# Altium PCB PCB1.PcbDoc
Units mm, origin at the board's own origin, x right, y up, seen from the top; angles counter-clockwise.
Board outline 37.6 x 55 mm, 4 copper layers (Top Layer, Mid Layer 1, Mid Layer 2, Bottom Layer), stack 0.97 mm thick; 33 components, 27 nets, 135 pads, 64 vias.
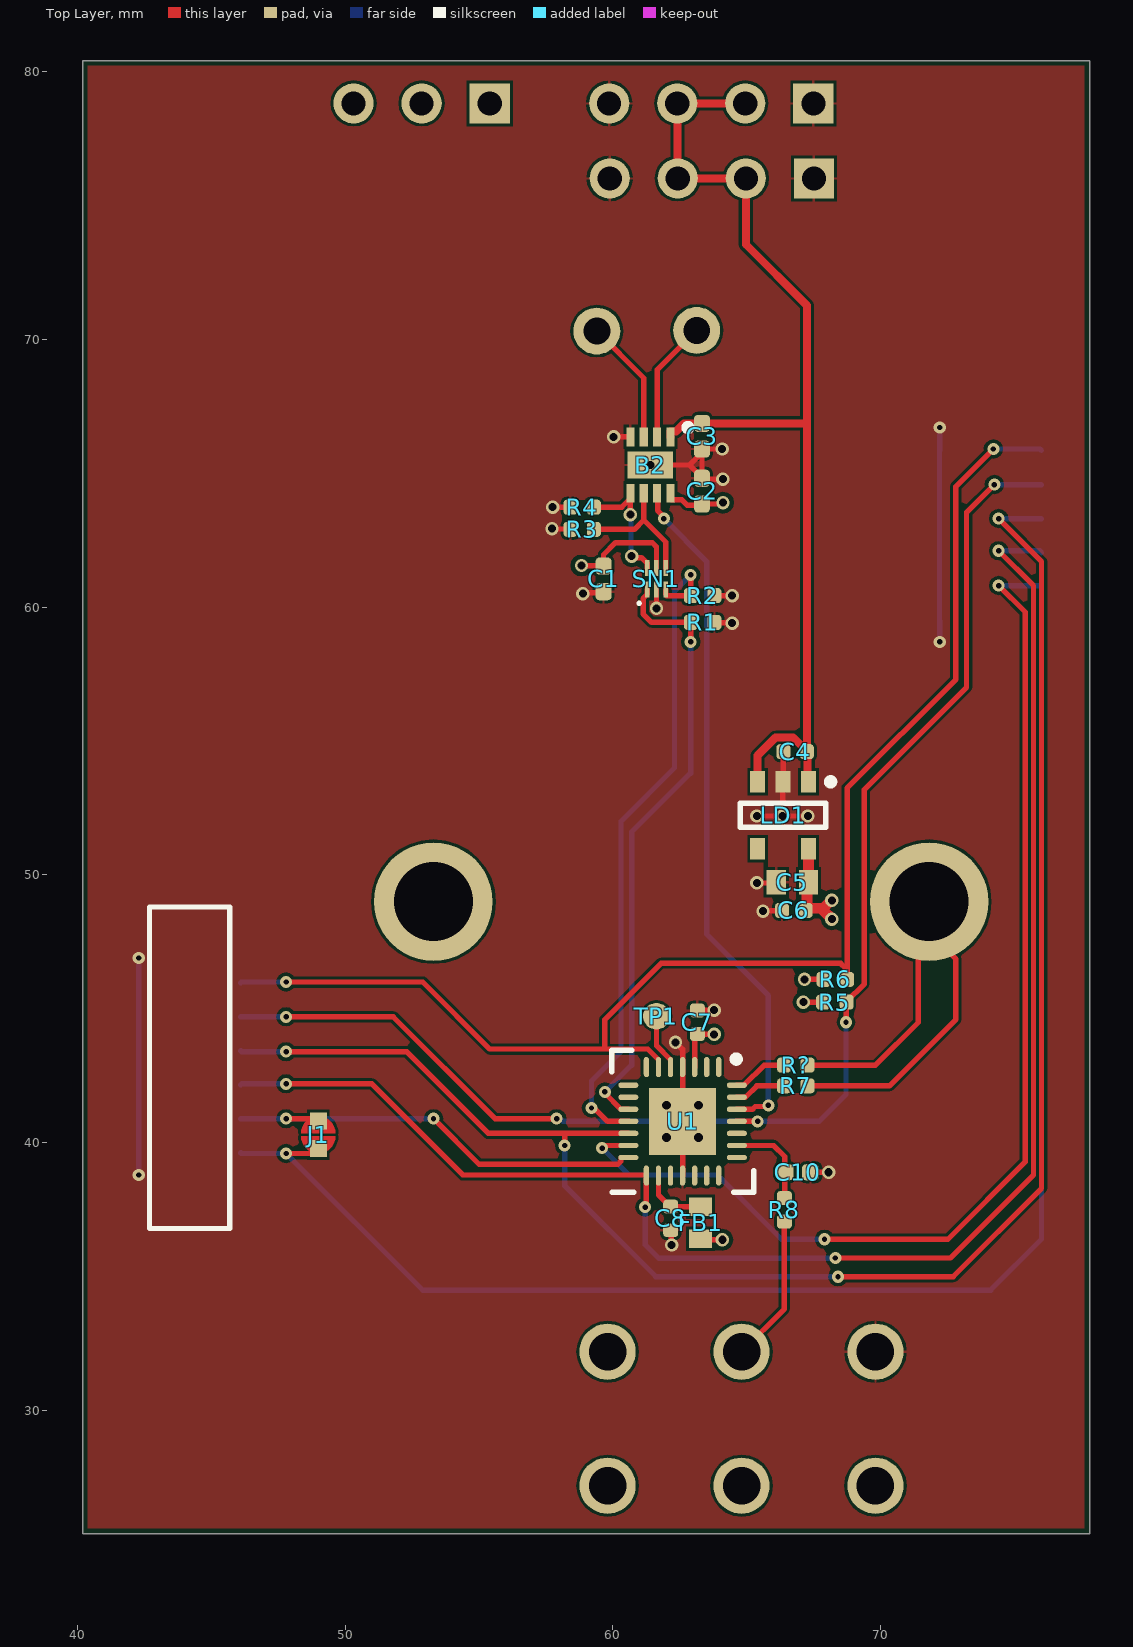
[diagram p0: Top Layer view]
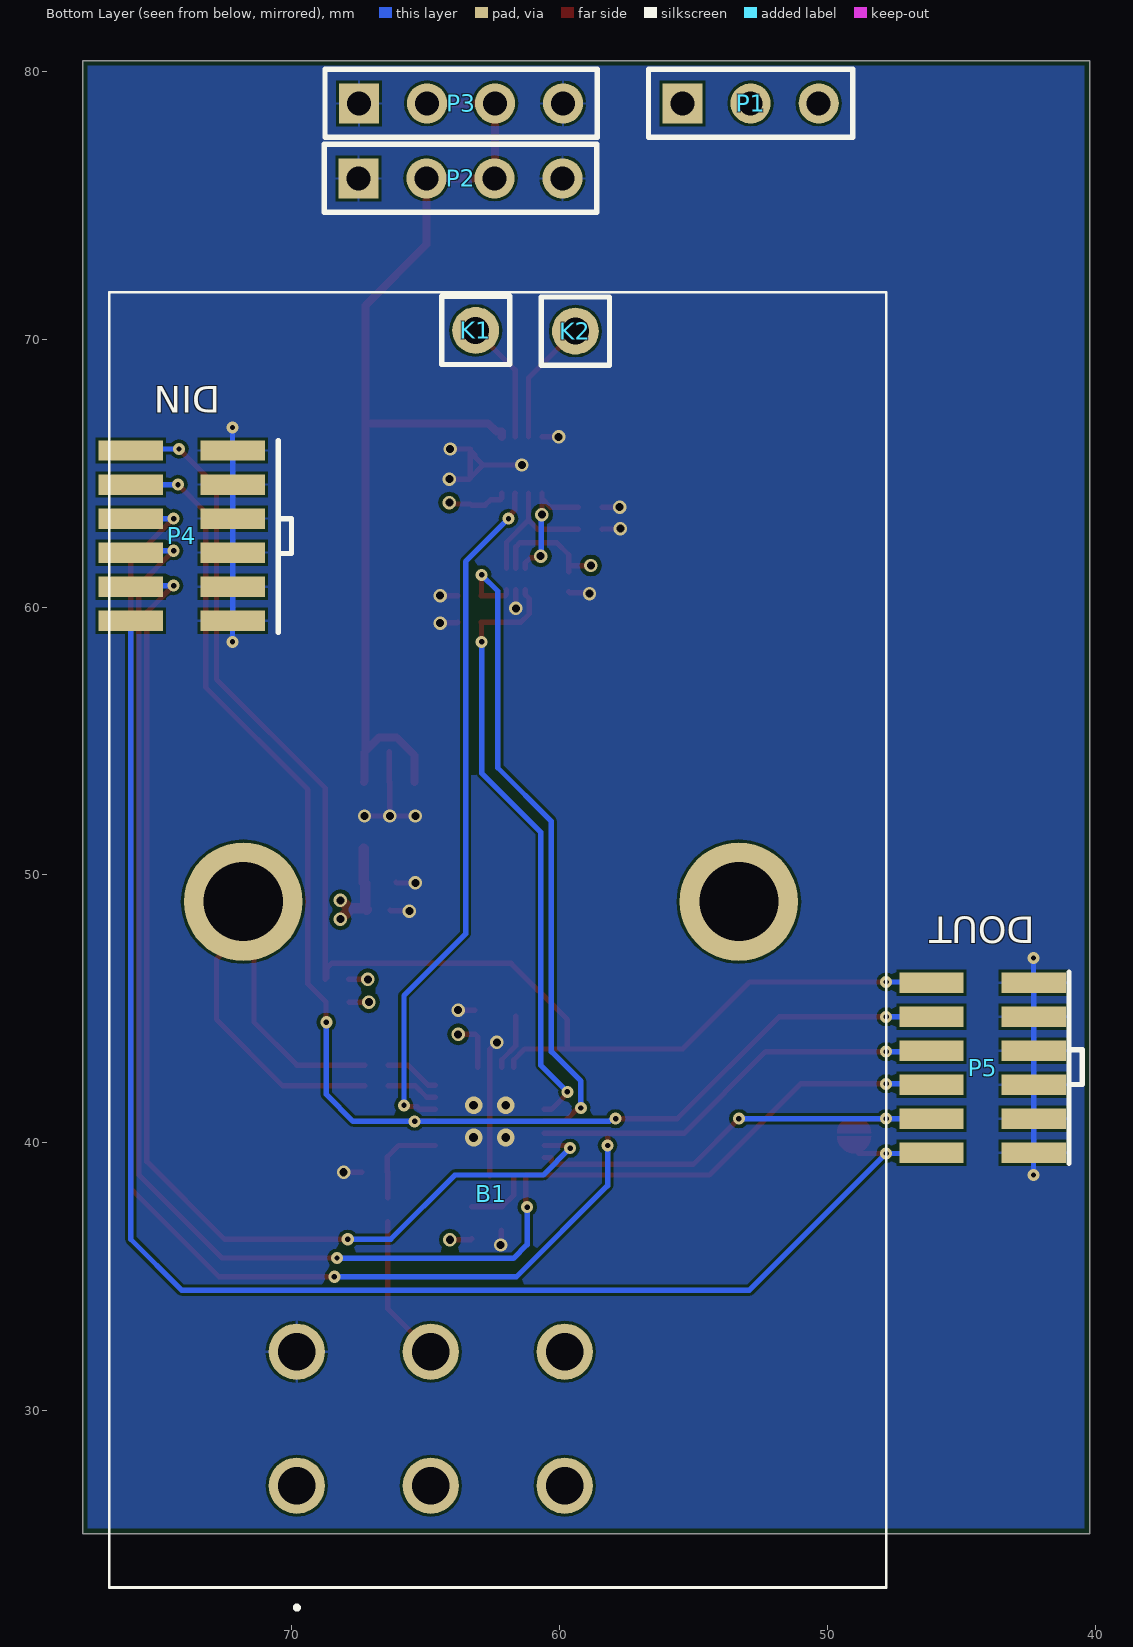
[diagram p1: Bottom Layer view, seen from below]
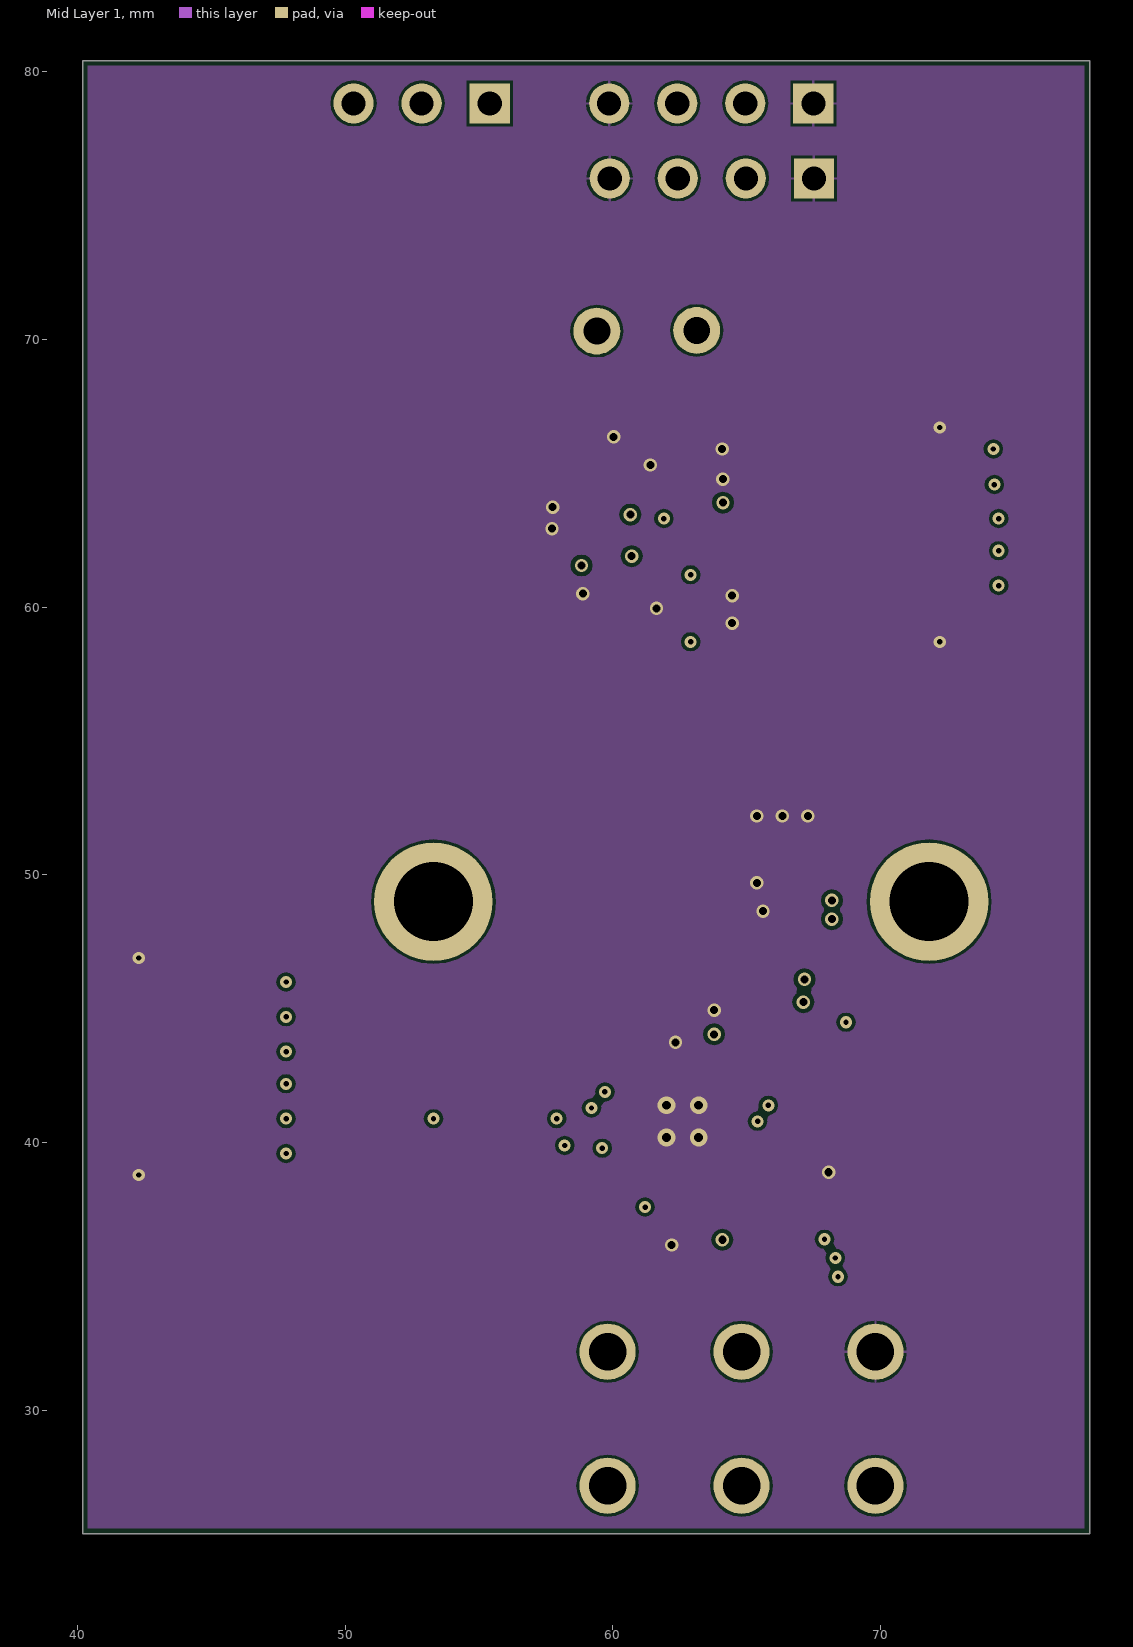
[diagram p2: Mid Layer 1]
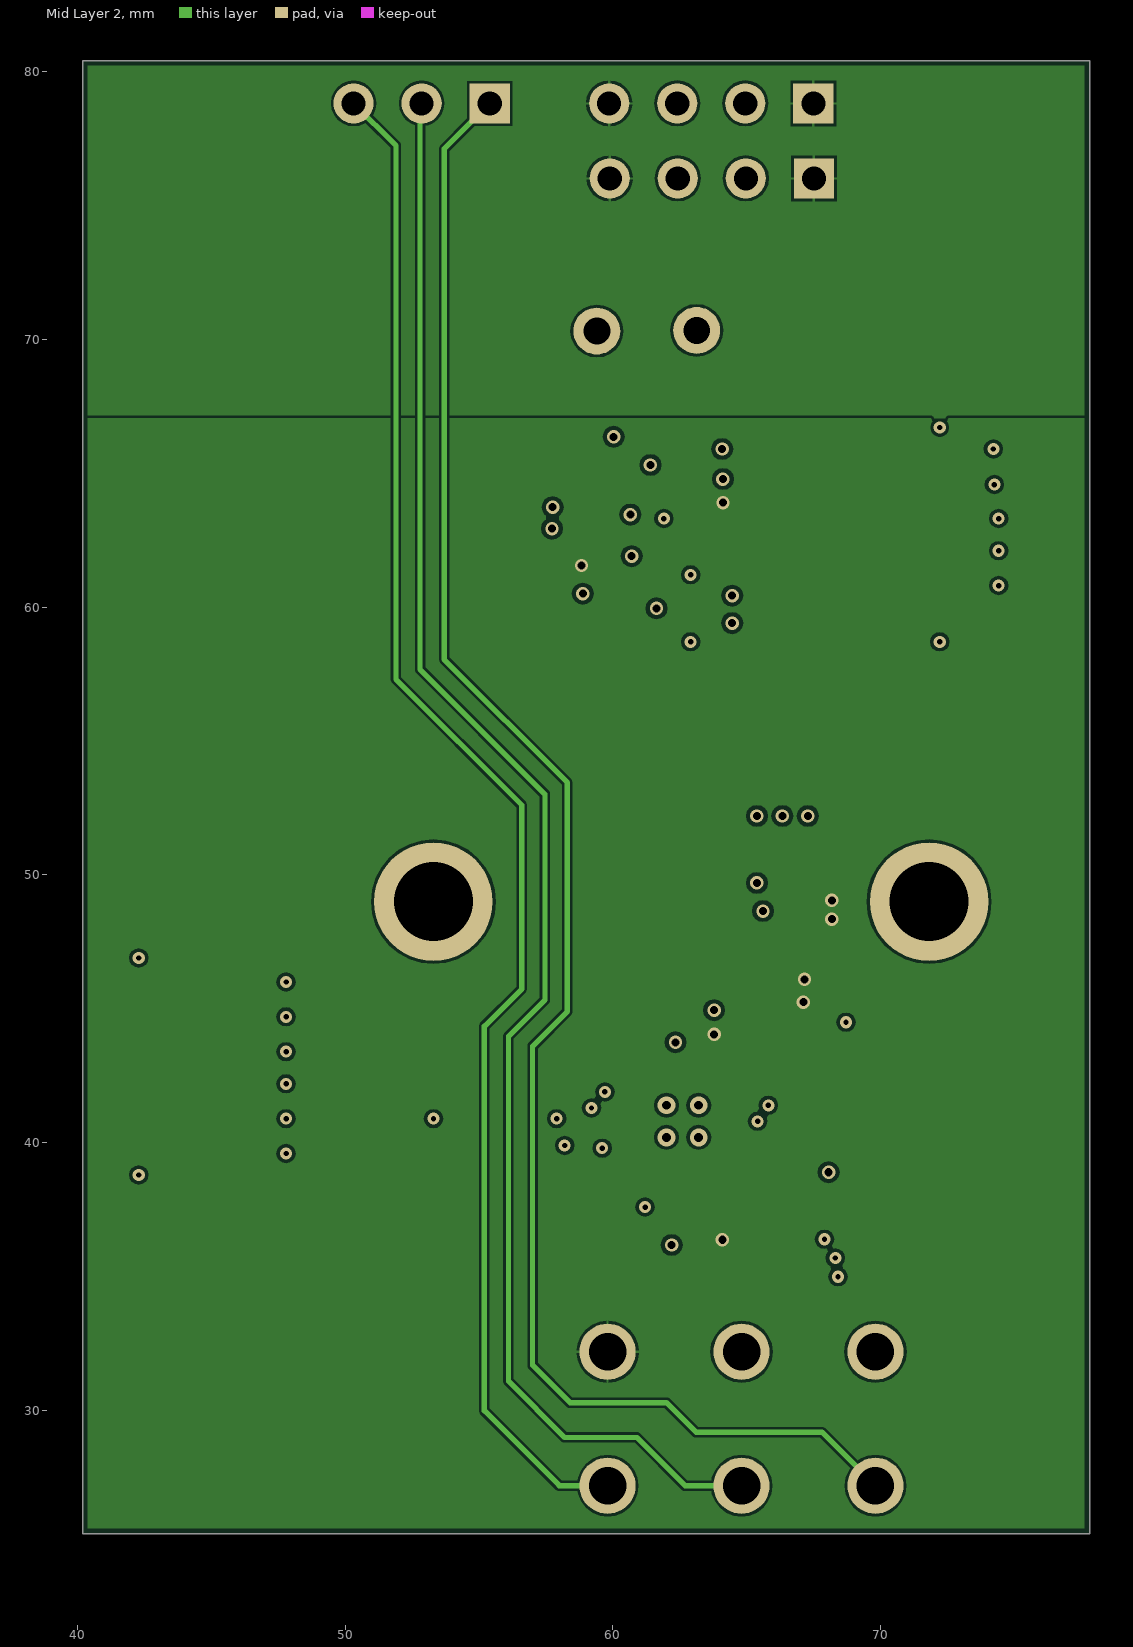
[diagram p3: Mid Layer 2]

## Layer stack, top to bottom
Top Solder: solder mask 0.0127, Solder Resist, Dk 3.8
Top Layer: signal copper 0.035
Dielectric 1: prepreg 0.2, 7628, Dk 4.6
Mid Layer 1: signal copper 0.0175
Core: core 0.465, FR-4, Dk 4.5
Mid Layer 2: signal copper 0.0175
Dielectric 2: prepreg 0.2, 7628, Dk 4.6
Bottom Layer: signal copper 0.035
Bottom Solder: solder mask 0.0127, Solder Resist, Dk 3.8

## Board outline
40.2,25.4 40.2,80.4 77.8,80.4 77.8,25.4

## Design rules (kind name [scope] priority, off if disabled: settings)
BoardOutlineClearance [All] p1: gap=0.2 ignorepadtopadclearanceinfootprint=FALSE
Clearance [All] p1: gap=0.102 ignorepadtopadclearanceinfootprint=FALSE except(0.127: Arc-Via Track-Via SMDPad-Via THPad-Via Via-Via Via-Fill Via-Poly Via-Region Via-Text; 0.25: Arc-Hole Track-Hole SMDPad-Hole THPad-Hole Via-Hole Fill-Hole Poly-Hole Region-Hole Text-Hole)
ComponentClearance [All] p1: gap=0.102 collisioncheckmode=3 verticalgap=0.102 showdistances=TRUE
DiffPairsRouting [All] p1: maxlimit=0.102 minlimit=0.102 mostfreqgap=0.102 toplayer_minwidth=0.102 toplayer_maxwidth=1816.048 toplayer_prefwidth=0.102 midlayer1_minwidth=0.102 midlayer1_maxwidth=1816.048 midlayer1_prefwidth=0.102 midlayer2_minwidth=0.102 midlayer2_maxwidth=1816.048 midlayer2_prefwidth=0.102 bottomlayer_minwidth=0.102 bottomlayer_maxwidth=1816.048 bottomlayer_prefwidth=0.102 maxuncoupledlength=12.7
Height [All] p1: minheight=0 maxheight=1816.048 prefheight=12.7
HoleSize [All] p1: absolutevalues=TRUE maxlimit=6.3 minlimit=0.2 maxpercent=80.000 minpercent=20.000
HoleToHoleClearance [All] p1: gap=0.25 allowstackedmicrovias=FALSE
MinimumAnnularRing [All] p1: minimumring=0.076
MinimumSolderMaskSliver [All] p1: minsoldermaskwidth=0
PlaneClearance [All] p1: clearance=0.102
PlaneConnect PlaneConnectPowerPads [InPadClass('PowerPads')] p1: planeconnectstyle=Direct reliefexpansion=0.508 reliefentries=4 reliefconductorwidth=0.254 reliefairgap=0.254
PlaneConnect [All] p2: pad.planeconnectstyle=Relief pad.reliefexpansion=0.3 pad.reliefentries=4 pad.reliefconductorwidth=0.102 pad.reliefairgap=0.102 via.planeconnectstyle=Direct via.reliefexpansion=0.3 via.reliefentries=4 via.reliefconductorwidth=0.127 via.reliefairgap=0.127
PolygonConnect PolygonConnectPowerPads [All vs (InPadClass('PowerPads'))] p1: connectstyle=Direct reliefconductorwidth=0.254 reliefentries=4 polygonreliefangle="90 Angle" airgapwidth=0.254
PolygonConnect [All] p2: thpad.connectstyle=Relief thpad.reliefconductorwidth=0.102 thpad.reliefentries=4 thpad.polygonreliefangle="90 Angle" thpad.airgapwidth=0.102 smdpad.connectstyle=Relief smdpad.reliefconductorwidth=0.102 smdpad.reliefentries=4 smdpad.polygonreliefangle="90 Angle" smdpad.airgapwidth=0.102 via.connectstyle=Direct via.reliefconductorwidth=0.127 via.reliefentries=4 via.polygonreliefangle="90 Angle" via.airgapwidth=0.127
RoutingVias [All] p1: holewidth=0.2 width=0.45 viastyle="Through Hole" minholewidth=0.2 minwidth=0.45 maxholewidth=6.3 maxwidth=6.55
SilkToSilkClearance [All] p1: silktosilkclearance=0
SilkToSolderMaskClearance [IsPad] p1: minsilkscreentomaskgap=0.102 clearancetoexposedcopper=TRUE
SolderMaskExpansion [All] p1: expansion=0.075 istentingtop=FALSE
Width [All] p1: maxlimit=1816.048 minlimit=0.102 preferedwidth=0.102
20 further rules are at their usual default settings.

## Components (designator, comment, footprint, x,y, rotation, side; value= is the part's Value field where it differs from the comment)
B1 "PRM162-K420K-103B1" PRM162K415K103B1 69.8,27.2 r270 bottom locked
B2 "DRV8837CDSGR" SON50P200X200X80-9N 61.4,65.3 r270 top
C1 "100n" R1005_0402i_M 59.65,61.05 r90 top
C2 "100n" R1005_0402i_M 63.325,64.325 r270 top
C3 "100n" R1005_0402i_M 63.325,66.375 r270 top
C4 "100n" R1005_0402i_L 66.8,54.6 r180 top
C5 "1u" C1608_0603I_L 66.7,49.725 r180 top
C6 "100n" R1005_0402i_L 66.75,48.675 r180 top
C7 "100n" R1005_0402i_L 63.15,44.5 r90 top
C8 "100n" R1005_0402i_L 62.158,37.176 r270 top
C10 "100n" R1005_0402i_M 66.9,38.9 r0 top
FB1 "FERITTE BEAD" R1608_0603I_L 63.272,37.017 r90 top
J1 "Terminator" solderJumper 49,40.3 r90 top
K1 "H1x1" H1x1 63.125,70.325 r180 bottom
K2 "H1x1" H1x1 59.4,70.3 r180 bottom
LD1 "NCP115 3.3V" TSOP95P280X110-6L 66.35,52.225 r270 top
P1 "Header 3" HDR1X3 55.4,78.8 r180 bottom
P2 "PWR" HDR1X4 67.5,76 r180 bottom
P3 "PWR" HDR1X4 67.48,78.8 r180 bottom
P4 "Input" "1.27mm SMD conn" 74.095,62.665 r270 bottom
P5 "Output" "1.27mm SMD conn" 44.2,42.8 r270 bottom
R1 "100k" R1005_0402i_L 63.35,59.425 r0 top
R2 "100k" R1005_0402i_L 63.35,60.425 r0 top
R3 "100k" R1005_0402i_L 58.85,62.9 r180 top
R4 "100k" R1005_0402i_L 58.85,63.725 r180 top
R5 "100k" R1005_0402i_L 68.285,45.25 r0 top
R6 "100k" R1005_0402i_L 68.3,46.1 r0 top
R7 "1M" R1005_0402i_L 66.825,42.125 r0 top
R8 "1k" R1005_0402i_L 66.4,37.5 r90 top
R? "1k" R1005_0402i_L 66.825,42.9 r0 top
SN1 "SN74LV" SON35P100X40-6N 61.625,61.05 r90 top
TP1 "PAD" PAD 61.625,44.725 r135 top
U1 "ATtiny88-MMU" 28M1_N 62.6,40.8 r270 top

## Footprints (in the part's own frame and the unit in brackets; to place one, negate y for a bottom-side part, rotate by r counter-clockwise, add the part's x,y. Pads: shape width x height; smd on the part's side, far side on the other; paste and mask are expansions set on the pad)
"1.27mm SMD conn" [mm]
  rect 0.76x2.4 smd: 1(3.175,1.905) 2(3.175,-1.905) 3(1.905,1.905) 4(1.905,-1.905) 5(0.635,1.905) 6(0.635,-1.905) 7(-0.635,1.905) 8(-0.635,-1.905) 9(-1.905,1.905) 10(-1.905,-1.905) 11(-3.175,1.905) 12(-3.175,-1.905)
28M1_N [mm] "QFN, 28-Leads, Body 4x4mm, Pitch 0.45mm, IPC Medium Density"
  oval 0.75x0.2 smd: 1(-2.025,1.35) 2(-2.025,0.9) 3(-2.025,0.45) 4(-2.025,0) 5(-2.025,-0.45) 6(-2.025,-0.9) 7(-2.025,-1.35) 15(2.025,-1.35) 16(2.025,-0.9) 17(2.025,-0.45) 18(2.025,0) 19(2.025,0.45) 20(2.025,0.9) 21(2.025,1.35)
  oval 0.2x0.75 smd: 8(-1.35,-2.025) 9(-0.9,-2.025) 10(-0.45,-2.025) 11(0,-2.025) 12(0.45,-2.025) 13(0.9,-2.025) 14(1.35,-2.025) 22(1.35,2.025) 23(0.9,2.025) 24(0.45,2.025) 25(0,2.025) 26(-0.45,2.025) 27(-0.9,2.025) 28(-1.35,2.025)
  rect 2.5x2.5 smd: 29(0,0)
  silkscreen extent -2.45,1.88 -2.2,2.13, body extent -2.02,-2.02 2.03,2.03, height 1
C1608_0603I_L [mm] "Chip Capacitor, 2-Leads, Body 1.57x0.85mm, IPC High Density"
  rect 0.72x0.9 smd: 1(-0.6,0) 2(0.6,0)
  body extent -0.82,-0.48 0.82,0.48, height 0.95
H1x1 [mm]
  round 1.75 hole 1: 1(0,0)
  silkscreen extent -1.27,-1.27 1.27,1.27, body extent -1.27,-1.27 1.27,1.27, height 8.4
HDR1X3 [mm] "Connector; Header; 3 Position"
  rect 1.5x1.5 hole 0.9: 1(0,0)
  round 1.5 hole 0.9: 2(2.54,0) 3(5.08,0)
  silkscreen extent -1.27,-1.27 6.35,1.27
HDR1X4 [mm] "Connector; Header; 4 Position"
  rect 1.5x1.5 hole 0.9: 1(0,0)
  round 1.5 hole 0.9: 2(2.54,0) 3(5.08,0) 4(7.62,0)
  silkscreen extent -1.27,-1.27 8.89,1.27
PAD [mm]
  round 1 smd: 1(0,0)
PRM162K415K103B1 [mm]
  round 2.1 hole 1.4: 1(0,0) 2(0,5) 3(0,10) 4(-5,0) 5(-5,5) 6(-5,10)
  round 4.425 hole 2.95: MH1(-21.8,-2) MH2(-21.8,16.5)
  silkscreen extent -44.55,-7 4.6,22, body extent -44.59,-6.99 23.76,27.64, height 30.47
R1005_0402i_L [mm] "Resistor, Chip; 1.00 mm L X 0.50 mm W X 0.40 mm H body"
  rrect50% 0.52x0.56 smd: 1(-0.44,0) 2(0.44,0)
  body extent -0.5,-0.25 0.5,0.25, height 0.4
R1005_0402i_M [mm] "Resistor, Chip; 1.00 mm L X 0.50 mm W X 0.40 mm H body"
  rrect50% 0.64x0.6 smd: 1(-0.48,0) 2(0.48,0)
  body extent -0.5,-0.25 0.5,0.25, height 0.4
R1608_0603I_L [mm] "Chip Resistor, 2-Leads, Body 1.57x0.85mm, IPC High Density"
  rect 0.7x0.85 smd: 1(-0.6,0) 2(0.6,0)
  body extent -0.82,-0.48 0.83,0.48, height 0.5
solderJumper [mil]
  rect 25x25 smd: 1(20,0) 2(-20,0)
  Top Layer region: -2.51,25 -12.08,23.1 -20.19,17.68 -25.61,9.57 -27.51,0 -27.51,0 -25.61,-9.57 -20.19,-17.68 -12.08,-23.1 -2.51,-25 -2.51,-25
  Top Layer region: 2.51,25 12.08,23.1 20.19,17.68 25.61,9.57 27.51,0 27.51,0 25.61,-9.57 20.19,-17.68 12.08,-23.1 2.51,-25 2.51,-25
SON35P100X40-6N [mm] "SON, 6-Leads, Body 1,00x1,00mm, Pitch 0,35mm, IPC Medium Density"
  rect 0.6x0.17 smd: 1(-0.4,0.35) 2(-0.4,0) 3(-0.4,-0.35) 4(0.4,-0.35) 5(0.4,0) 6(0.4,0.35)
  silkscreen extent -0.96,0.6 -0.86,0.7, body extent -0.57,-0.53 0.57,0.53, height 0.4
SON50P200X200X80-9N [mm]
  rect 0.7x0.3 smd: 1(-1.05,0.75) 2(-1.05,0.25) 3(-1.05,-0.25) 4(-1.05,-0.75) 5(1.05,-0.75) 6(1.05,-0.25) 7(1.05,0.25) 8(1.05,0.75)
  rect 1x1.7 smd: 9(0,0)
  silkscreen extent -1.52,1.28 -1.28,1.53, body extent -1.52,-1.02 1.52,1.02, height 0.25
TSOP95P280X110-6L [mm]
  rect 0.8x0.55 smd: 1(-1.25,0.95) 2(-1.25,0) 3(-1.25,-0.95) 4(1.25,-0.95) 5(1.25,0.95)
  silkscreen extent -1.37,-1.6 0.45,1.9, body extent -1.38,-1.6 1.38,1.6, height 1.1

## Part data
B1: "Potentiometers 10KOHMS KNURLED DUAL NO DET", Manufacturer_Name=Bourns, Mouser Part Number=652-PRM162K420K103B1, Datasheet Link=https://www.bourns.com/docs/product-datasheets/PDB18.pdf, Geometry.Height=28.5mm, Manufacturer_Part_Number=PRM162-K420K-103B1, Mouser Price/Stock=https://www.mouser.co.uk/ProductDetail/Bourns/PRM162-K420K-103B1?qs=U%2FacTlguYxaZbpiLvzzeCA%3D%3D
B2: "1A Low-Voltage H-Bridge Driver", Manufacturer_Name="Texas Instruments", Mouser Part Number=595-DRV8837CDSGR, Datasheet Link=http://www.ti.com/lit/gpn/drv8837c, Geometry.Height=0.8mm, Manufacturer_Part_Number=DRV8837CDSGR, Mouser Price/Stock=https://www.mouser.co.uk/ProductDetail/Texas-Instruments/DRV8837CDSGR?qs=vcbl%252BK4rRlftuEtjGJGzZQ%3D%3D
C1 C2 C3 C4 C5 C6 C7 C8 C10: library part C, "Capacitor"
J1: library part JMP_mini
K1 K2: "Header 1x1 (male)"
P1: "Header, 3-Pin", LatestRevisionDate=17-Jul-2002, LatestRevisionNote="Re-released for DXP Platform.", Publisher="Altium Limited"
P2 P3: library part "Header 4", "Header, 4-Pin", LatestRevisionDate=17-Jul-2002, LatestRevisionNote="Re-released for DXP Platform.", Publisher="Altium Limited"
P4 P5: library part "Header 6X2", "Header, 6-Pin, Dual row", LatestRevisionDate=17-Jul-2002, LatestRevisionNote="Re-released for DXP Platform.", Publisher="Altium Limited"
R1 R2 R3 R4 R5 R6 R7 R8 R?: library part R, "R"
U1: "8-bit AVR Microcontroller, 1.8-5.5V, 8KB Flash, 64 Bytes EEPROM, 512 Bytes SRAM, 28-pin MLF, Industrial Grade (-40°C to 85°C), Pb-Free", Supplier Part Number 1=ATTINY88-MMU-ND, ComponentLink1Description="Manufacturer Link", ComponentLink1URL=http://www.atmel.com/products/avr/default.asp?, ComponentLink2Description="ATtiny48/88 Datasheet", ComponentLink2URL=http://www.atmel.com/dyn/resources/prod_documents/doc8008.pdf, ComponentLink3Description="ATtiny48/88 Summary", ComponentLink3URL=http://www.atmel.com/dyn/resources/prod_documents/8008S.pdf, ComponentLink4Description="Atmel.com Home", ComponentLink4URL=http://www.atmel.com, DatasheetVersion="revC, Mar-2009", PackageDescription="28-pad, 4x4x1.0mm Body, Pitch 0.45mm, 2.4x2.4mm Exposed Pad, Plastic Very Thin QFN Package (VQFN)", PackageReference=28M1, PackageVersion="revB, Nov-2008", Published=1-Apr-2010, Publisher="Altium Limited", Supplier 1=Digi-Key, Supplier 2=Mouser, Supplier Part Number 2=556-ATTINY88-MMU

## Via types
v1: diameter 0.45, hole 0.2, Top Layer to Bottom Layer, 31 vias
v2: diameter 0.5, hole 0.3, Top Layer to Bottom Layer, 29 vias
v3: diameter 0.66, hole 0.33, Top Layer to Bottom Layer, tented top, 4 vias

## Nets (pads, with @x,y where several pads share a name; then routed paths per layer and width w, separated by ;. In a path a pad name is that pad's centre, name@x,y a point inside that pad or via, vN(x,y) a via of type N, cw(c..) or ccw(c..) an arc to the next point about the centre after c; other vN are vias at no path point)
+3.3V: B1.6 B2.8 C1.2 C2.2 C5.1 C6.1 C7.1 FB1.1 LD1.5 R5.1 R6.1 SN1.5 U1.3 | length 17.6
  Top Layer w0.2: v2(58.825,61.55) 58.835,61.54 59.64,61.54 C1.2 ; C1.2@59.65,61.312 C1.2 ; SN1.5 61.625,62.243 61.468,62.4 60.1,62.4 59.65,61.95 C1.2 ; B2.8 62.15,64.05 62.2,64 62.57,64 62.77,63.8 63.28,63.8 C2.2 64.054,63.845 v2(64.107,63.897) ; U1.3 63.05,43.96 C7.1 63.155,44.055 63.77,44.055 v2(63.775,44.05) ; FB1.1 63.308,36.381 v2(64.085,36.381) ; v2(67.11,45.25) R5.1 ; v2(67.15,46.1) R6.1 ; C6.1 67.19,48.695 67.19,49.615 67.245,49.67 C5.1 LD1.5 ; 67.772,48.675 67.852,48.755 v2@68.147,49.05 ; v2@68.148,49.05 v2(68.175,49.05)
  Top Layer w0.4: C6.1@67.19,48.695 C6.1@67.245,48.75 ; C5.1@67.245,49.67 C6.1@67.245,48.75 ; C5.1 LD1.5 ; 67.85,48.675 v2(68.175,48.35) ; 67.852,48.755 67.25,48.755 C6.1@67.245,48.75 ; 67.853,48.755 v2@68.148,49.05
+5: B2.1 C3.1 C4.1 LD1.1 LD1.3 P2.2 P2.3 P3.2 P3.3 | length 40.1
  Top Layer w0.3: B2.1 62.15,66.55 62.35,66.55 62.655,66.855 C3.1 67.185,66.855 67.24,66.8 ; P3.2 P3.3 62.41,78.79 62.41,76.01 P2.3 P2.2 64.96,73.54 67.24,71.26 67.24,66.8 ; LD1.3 65.4,54.46 66.072,55.132 66.728,55.132 C4.1@67.24,54.62 ; LD1.1 67.27,53.505 67.27,54.57 C4.1 C4.1@67.24,54.62 ; C4.1@67.24,54.62 67.24,66.8
AVCC: C8.1 FB1.2 U1.16 | length 2.5
  Top Layer w0.2: U1.16 61.7,38.054 62.138,37.616 C8.1 63.271,37.616 FB1.2
GND: B1.4 B2.4 B2.9 C1.1 C2.1 C3.2 C4.2 C5.2 C6.2 C7.2 C8.2 C10.2 LD1.2 P2.1 P2.4 P3.1 P3.4 P4.1 P4.3 P4.5 P4.7 P4.9 P4.11 P5.1 P5.3 P5.5 P5.7 P5.9 P5.11 R1.2 R2.2 R3.2 R4.2 SN1.2 U1.4 U1.18 U1.29 | length 42.9
  Top Layer w0.2: v2(57.725,62.925) 57.738,62.913 58.398,62.913 R3.2 ; v2(57.75,63.725) R4.2 ; v2(58.875,60.5) 58.91,60.535 59.615,60.535 C1.1 ; v2(60.025,66.354) 60.646,66.354 B2.4 ; v2(61.4,65.3) 62.85,65.3 ; v2(61.625,59.95) SN1.2 ; C8.2 62.176,36.718 62.176,36.204 v2(62.193,36.186) ; v2(62.335,43.752) 62.6,43.487 U1.29 U1.18 ; C7.2 63.155,44.945 63.77,44.945 v2(63.775,44.95) ; R1.2 63.803,59.413 64.438,59.413 v2(64.45,59.4) ; R2.2 v2(64.45,60.425) ; v2(64.075,65.9) 64.073,65.898 63.328,65.898 C3.2 C3.2@63.325,65.775 ; v2(64.106,64.776) 63.354,64.776 C2.1 C2.1@63.325,64.825 ; v2(65.375,49.7) 66.075,49.7 C5.2 ; v2(65.375,52.2) v2(66.325,52.2) ; v2(65.6,48.65) 65.613,48.663 66.297,48.663 C6.2 ; C4.2 66.355,54.595 66.355,53.48 LD1.2 66.338,53.463 66.338,52.213 v2(66.325,52.2) ; v2(67.275,52.2) v2(66.325,52.2) ; C10.2 v2(68.05,38.9) ; 62.85,65.3 63.156,65.606 63.156,65.679 63.252,65.775 C3.2@63.325,65.775 ; 62.85,65.3 C2.1@63.325,64.825 ; C2.1@63.325,64.825 C3.2@63.325,65.775
  Bottom Layer w0.2: v1(42.3,38.8) 42.3,39.62 P5.1 P5.11 42.3,45.98 v1(42.3,46.9) ; P4.7 P4.11 ; P4.9 P4.11 ; v1(72.2,58.7) 72.2,59.48 P4.1 P4.11 ; v1(72.2,66.7) 72.2,65.85 P4.11
  other v3: 62,40.2 63.2,40.2 62,41.4 63.2,41.4
INT: P4.12 P5.12 R6.2 U1.6 | length 52.4
  Top Layer w0.2: v1(47.8,46) 52.9,46 55.4,43.5 59.7,43.5 ; U1.6 61.7,43.1 61.3,43.5 59.7,43.5 ; v1(74.2,65.9) 72.8,64.5 72.8,57.3 68.74,53.24 68.74,46.524 R6.2 68.676,46.164 68.676,46.524 68.5,46.7 61.8,46.7 59.7,44.6 59.7,43.5
  Bottom Layer w0.2: P5.12 46.13,46 v1(47.8,46) ; v1(74.2,65.9) 75.94,65.9 P4.12
MISO: J1.2 P4.2 P5.2 | length 57.2
  Top Layer w0.2: v1(47.8,39.6) 48.808,39.6 J1.2
  Bottom Layer w0.2: P5.2 46.13,39.6 v1(47.8,39.6) 52.9,34.5 74.1,34.5 76,36.4 P4.2
MISO_T88: J1.1 P5.4 U1.14 | length 16.6
  Top Layer w0.2: v1(47.8,40.9) 48.908,40.9 J1.1 ; v1(53.3,40.9) 55,39.2 60.183,39.2 60.3,39.317 60.3,39.45 U1.14
  Bottom Layer w0.2: P5.4 46.11,40.9 v1(47.8,40.9) v1(53.3,40.9)
MOSI_T88: P4.4 U1.13 | length 43
  Top Layer w0.2: v1(59.6,39.8) 59.668,39.8 59.768,39.9 U1.13 ; v1(67.9,36.4) 72.5,36.4 75.397,39.297 75.397,59.803 v1(74.4,60.8)
  Bottom Layer w0.2: v1(59.6,39.8) 60.6,38.8 63.9,38.8 66.3,36.4 v1(67.9,36.4) ; v1(74.4,60.8) 75.96,60.8 P4.4
MS: R1.1 SN1.1 U1.10 | length 22.9
  Top Layer w0.2: v1(59.7,41.9) 59.7,41.85 60.3,41.25 U1.10 ; SN1.1 61.275,60.465 61.125,60.315 61.125,59.743 61.443,59.425 R1.1 62.905,59.42 62.905,58.705 v1(62.9,58.7)
  Bottom Layer w0.2: v1(59.7,41.9) 60.7,42.9 60.7,51.6 62.9,53.8 v1(62.9,58.7)
NetB1_1: B1.1 P1.1 | length 64.9
  Mid Layer 2 w0.2: P1.1 53.7,77.1 53.7,58.046 58.3,53.446 58.3,44.9 57,43.6 57,31.7 58.4,30.3 62,30.3 63.1,29.2 67.8,29.2 B1.1
NetB1_2: B1.2 P1.2 | length 60.5
  Mid Layer 2 w0.2: P1.2 52.8,78.74 52.8,57.673 57.464,53.009 57.464,45.336 56.1,43.973 56.1,31.1 58.2,29 60.893,29 62.693,27.2 B1.2
NetB1_3: B1.3 P1.3 | length 57.7
  Mid Layer 2 w0.2: P1.3 51.9,77.22 51.9,57.3 56.6,52.6 56.6,45.746 55.2,44.346 55.2,30 58,27.2 B1.3
NetB2_2: B2.2 K1.1 | length 4.6
  Top Layer w0.2: B2.2 61.65,68.85 K1.1
NetB2_3: B2.3 K2.1 | length 4.7
  Top Layer w0.2: K2.1 61.15,68.55 B2.3
NetB2_5: B2.5 R4.1 SN1.6 | length 4.8
  Top Layer w0.2: R4.1 60.325,63.725 B2.5@60.65,64.05 ; v2@60.569,63.45 v2(60.65,63.45) B2.5@60.65,64.05 ; B2.5 B2.5@60.65,64.05 ; v2(60.7,61.9) 60.757,61.843 61.067,61.843 61.275,61.635 SN1.6
  Bottom Layer w0.2: v2(60.65,63.45) 60.675,63.425 60.675,61.925 v2(60.7,61.9)
NetB2_6: B2.6 R3.1 SN1.4 | length 5.1
  Top Layer w0.2: R3.1 60.807,62.9 61.15,63.243 ; B2.6 61.15,63.243 ; SN1.4 61.975,62.418 61.15,63.243
NetC10_1: C10.1 R8.2 U1.23 | length 3.5
  Top Layer w0.2: U1.23 66,39.9 66.42,39.48 C10.1 ; R8.2 66.41,37.95 C10.1@66.41,38.91
NetR7_1: R7.1 U1.27 | length 1.9
  Top Layer w0.2: U1.27 64.95,41.7 65.375,42.125 R7.1
NetR?_1: R?.1 U1.28 | length 2.1
  Top Layer w0.2: U1.28 64.9,42.15 65.65,42.9 R?.1
NetTP1_1: TP1.1 U1.5 | length 2.1
  Top Layer w0.2: TP1.1 61.625,43.625 62.15,43.1 U1.5
PWM: R2.1 SN1.3 U1.11 | length 24.9
  Top Layer w0.2: v1(59.2,41.3) 59.3,41.3 59.8,40.8 U1.11 ; SN1.3 61.975,60.465 62.015,60.425 R2.1 62.905,60.43 62.905,61.195 v1(62.9,61.2)
  Bottom Layer w0.2: v1(59.2,41.3) 59.2,42.3 60.3,43.4 60.3,52 62.3,54 62.3,60.6 v1(62.9,61.2)
R\E\S\E\T\: P4.10 P5.10 R5.2 U1.25 | length 52.3
  Top Layer w0.2: v1(47.8,44.7) 51.8,44.7 55.6,40.9 v1(57.9,40.9) ; U1.25 v1(65.4,40.8) ; v1(68.7,44.5) 68.712,44.512 68.712,45.237 R5.2 68.725,45.27 69.386,45.931 69.386,53.186 73.2,57 73.2,63.532 v1(74.238,64.57)
  Bottom Layer w0.2: P5.10 46.11,44.7 v1(47.8,44.7) ; v1(57.9,40.9) 57.948,40.852 58.09,40.852 58.142,40.8 v1(65.4,40.8) 67.7,40.8 68.7,41.8 v1(68.7,44.5) ; v1@74.168,64.5 v1(74.238,64.57) P4.10
S\S\: P4.8 P5.8 U1.12 | length 65.5
  Top Layer w0.2: v1(47.8,43.4) 52.3,43.4 55.35,40.35 58.2,40.35 ; v1(58.2,39.9) 58.2,40.35 ; U1.12 58.2,40.35 ; v1(68.4,35) 72.7,35 76,38.3 76,61.7 v1(74.4,63.3)
  Bottom Layer w0.2: P5.8 46.14,43.4 v1(47.8,43.4) ; v1(58.2,39.9) 58.2,38.4 61.6,35 v1(68.4,35) ; v1(74.4,63.3) P4.8
SCK: P4.6 P5.6 U1.15 | length 60.7
  Top Layer w0.2: v1(47.8,42.2) 51,42.2 54.4,38.8 61.25,38.8 U1.15 61.25,37.718 61.2,37.668 v1(61.2,37.6) ; v1(68.3,35.7) 72.6,35.7 75.698,38.798 75.698,60.802 v1(74.4,62.1)
  Bottom Layer w0.2: P5.6 46.14,42.2 v1(47.8,42.2) ; v1(61.2,37.6) 61.2,36.2 61.714,35.686 68.286,35.686 v1(68.3,35.7) ; v1(74.4,62.1) 75.93,62.1 P4.6
SLEEP: B2.7 U1.26 | length 25.8
  Top Layer w0.2: B2.7 61.668,64.232 61.668,63.6 61.9,63.368 v1(61.9,63.3) ; U1.26 65.211,41.25 65.313,41.352 65.752,41.352 v1(65.8,41.4)
  Bottom Layer w0.2: v1(61.9,63.3) 63.5,61.7 63.5,47.8 65.8,45.5 v1(65.8,41.4)
TCH_1: B1.MH1 R7.2 R?.2 | length 20.8
  Top Layer w0.2: R7.2 70.325,42.125 72.8,44.6 72.8,46.857 71.8,47.857 B1.MH1 71.4,48.6 71.4,44.5 69.8,42.9 R?.2
WIPER2: B1.5 R8.1 | length 5.5
  Top Layer w0.2: B1.5 66.4,33.8 R8.1
pads on no net: B1.MH2 LD1.4 U1.1 U1.2 U1.7 U1.8 U1.9 U1.17 U1.19 U1.20 U1.21 U1.22 U1.24

## Polygon pours and split planes (outlines as drawn)
+3.3V on Mid Layer 2 "NONET_L-01_P-001" (solid, remove dead copper, pour order 0): 77.8,67.05 77.8,25.4 40.2,25.4 40.2,67.05
GND on Mid Layer 2 "GND_L03_P004" (solid, pour order 4): 40.2,80.4 40.2,67.05 77.8,67.05 77.8,80.4
GND on Bottom Layer "NONET_L-01_P-001" (solid, remove dead copper, pour order 3): 40.2,80.4 40.2,25.4 77.6,25.4 77.6,80.4
GND on Mid Layer 1 "NONET_L-01_P-001" (solid, remove dead copper, pour order 5): 40.2,80.4 40.2,25.4 77.6,25.4 77.6,80.4
GND on Top Layer "NONET_L-01_P-001" (solid, remove dead copper, pour order 6): 40.2,80.4 40.2,25.4 77.6,25.4 77.6,80.4

## Silkscreen, mask and mechanical layers (free items; w line width, h text height)
Top Overlay:
  lines w0.2: 59.95,42.65 59.95,43.45 60.7,43.45 ; 59.975,38.15 60.775,38.15 ; 64.5,38.15 65.25,38.15 65.25,38.95 ; 42.7,36.8 45.7,36.8 45.7,48.8 42.7,48.8 42.7,36.8
Bottom Overlay:
  lines w0.2: 40.975,39.225 40.975,42.175 ; 40.975,46.375 40.975,43.475 ; 70.5,59.05 70.5,62 ; 70.5,66.2 70.5,63.3 ; 40.975,42.175 40.975,43.475 ; 40.975,42.175 40.475,42.175 40.475,43.475 40.975,43.475 ; 70.5,62 70,62 70,63.3 70.5,63.3 ; 70.5,62 70.5,63.3
  text "DIN" at 72.654,68.246 h1 r180
  text "DOUT" at 42.254,48.446 h1 r180
Mechanical 1:
  the board outline again, w0.2